# EAGLE board fDrive.RP2040 (EAGLE 9.6.2)
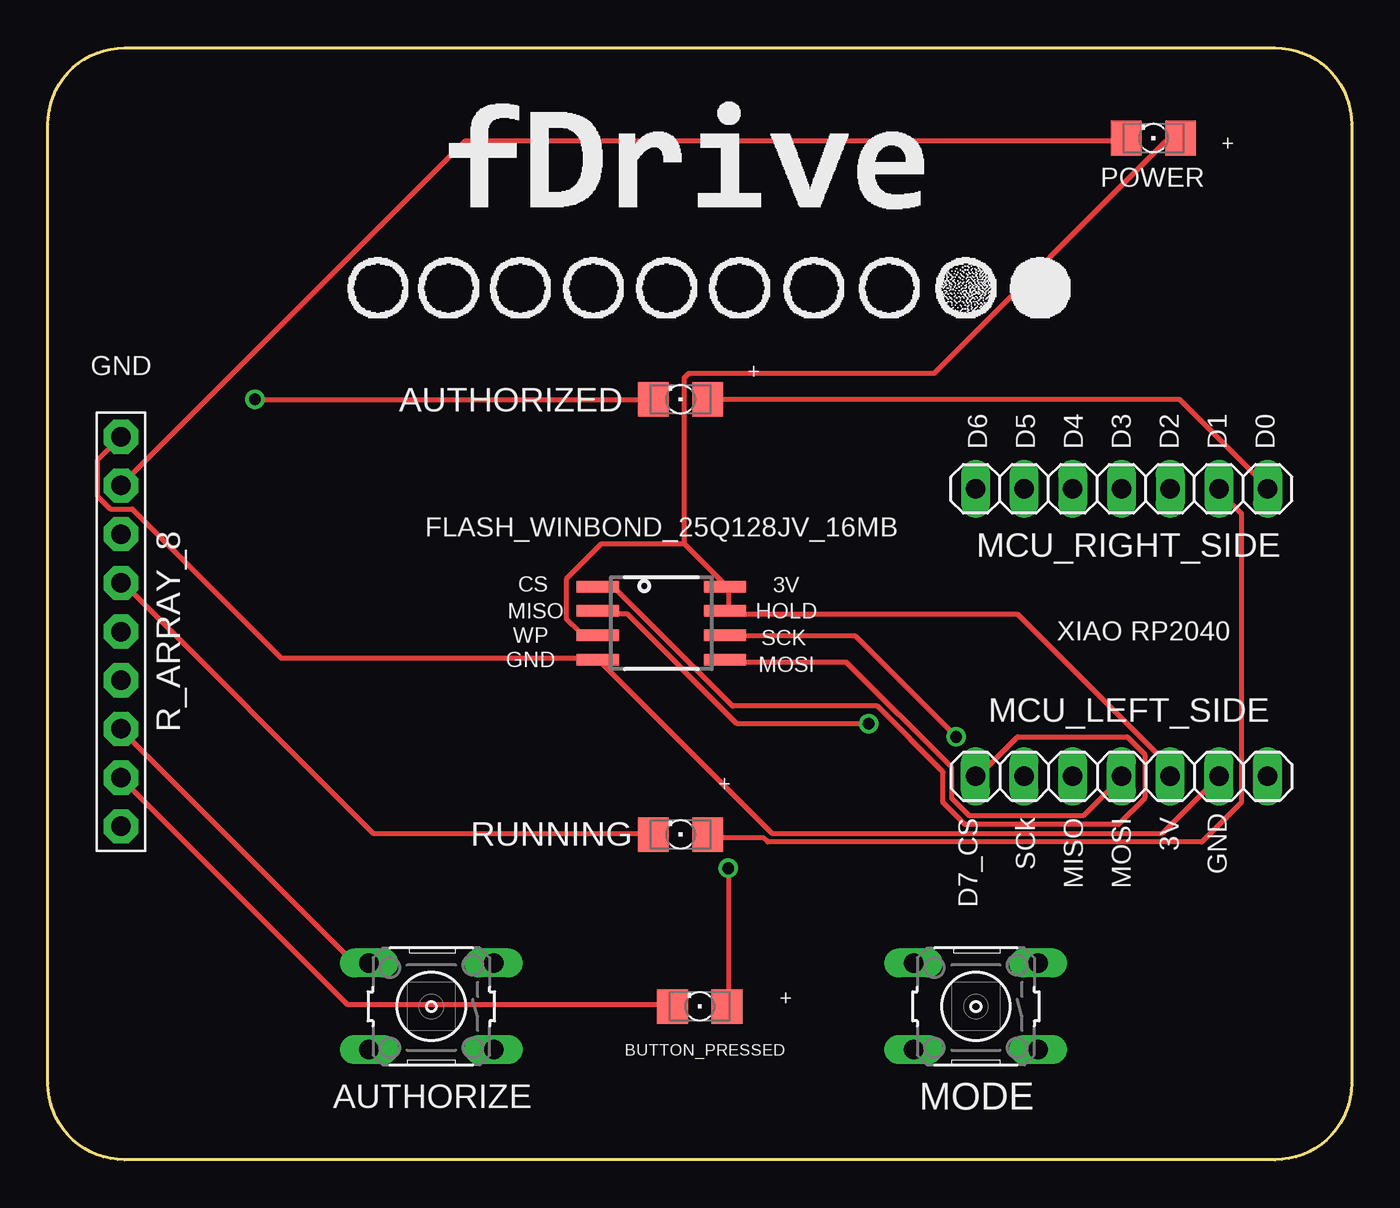
[diagram p0: board, top side]
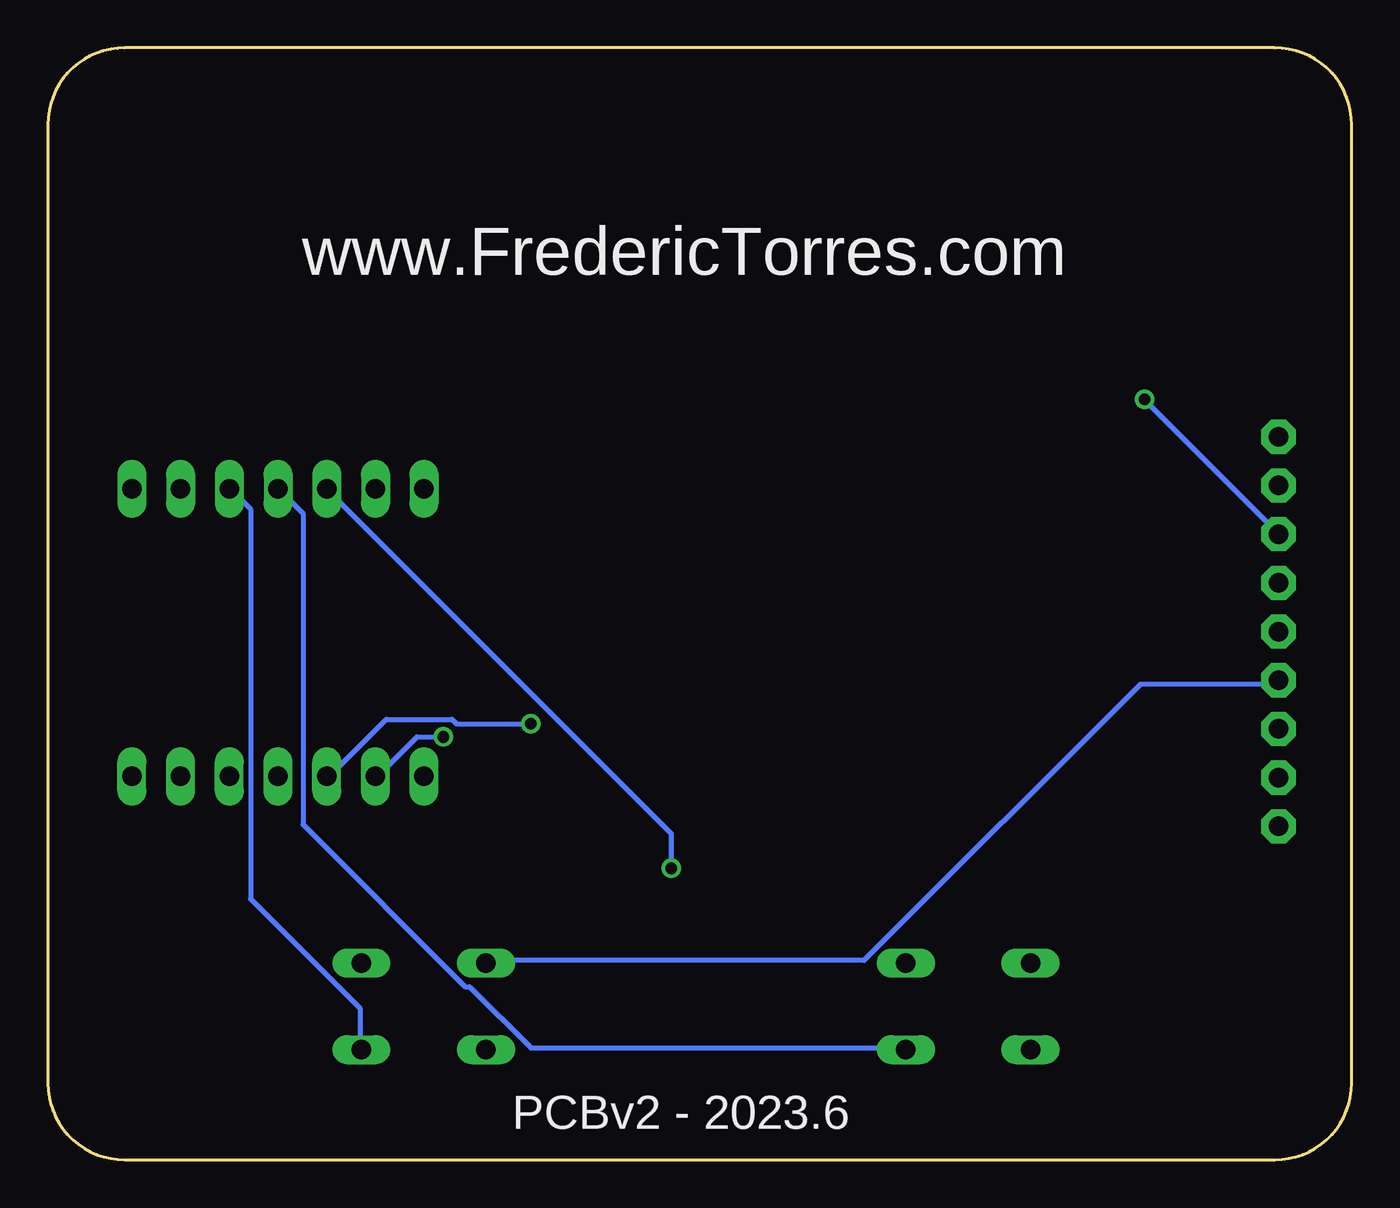
[diagram p1: board, bottom side, seen from below]

Size 68 x 58 mm. Coordinates in mm from the lower left corner, seen from the top.
Outline: 0,4 0,54 arc-90 4,58 64,58 arc-90 68,54 68,4 arc-90 64,0 4,0 arc-90 0,4
Copper layers (1*16): Top 0.035mm / dielectric 1.5mm / Bottom 0.035mm
Design rules "default": minimum track width 10mil, minimum drill 24mil, track to track 8mil, track to pad 8mil, pad to pad 8mil, via to via 8mil, smd to smd 8mil, copper to edge 40mil, drill to drill 8mil, minimum pad ring 10mil, minimum via ring 8mil, stop-mask expansion 4mil, vias tented up to drill 0mil, thermal gap 10mil

## Footprints (pad centres in the part's own frame; a part is rotated, then mirrored left to right if it is on the bottom)
B3F-10XX = drill 1.016 long: 1 -3.251,2.261; 2 3.251,2.261; 3 -3.251,-2.261; 4 3.251,-2.261
1206 = smd 1.6 x 1.803: A -1.422,0; C 1.422,0
SOIC8_208MIL = smd 0.6 x 2.2: 1 -1.905,-3.315; 2 -0.635,-3.315; 3 0.635,-3.315; 4 1.905,-3.315; 5 1.905,3.315; 6 0.635,3.315; 7 -0.635,3.315; 8 -1.905,3.315
1X07 = drill 1.016 long: 1 -7.62,0; 2 -5.08,0; 3 -2.54,0; 4 0,0; 5 2.54,0; 6 5.08,0; 7 7.62,0
1X09-BIG = drill 1.016 pad 1.778 octagon: 1 -10.16,0; 2 -7.62,0; 3 -5.08,0; 4 -2.54,0; 5 0,0; 6 2.54,0; 7 5.08,0; 8 7.62,0; 9 10.16,0

## Placement (x,y rotation side)
AUTHORIZE  [B3F-10XX]  20,8 180 top
AUTHORIZED  [1206]  33,39.67 180 top
BUTTON_PRESSED  [1206]  34,8 180 top
FLASH_WINBOND_25Q128JV_16MB  [SOIC8_208MIL]  32,28 270 top
MCU_LEFT_SIDE  [1X07]  56,20 0 top
MCU_RIGHT_SIDE  [1X07]  56,35 180 top
MODE  [B3F-10XX]  48.4,8 180 top
POWER  [1206]  57.67,53.29 180 top
R_ARRAY_8  [1X09-BIG]  3.81,27.56 270 top
RUNNING  [1206]  33,16.97 180 top

## Library data of the parts
AUTHORIZE MODE = switch-omron; MPN: B3F-1000; OC_FARNELL: 176432; OC_NEWARK: 36M3542
AUTHORIZED BUTTON_PRESSED POWER R_ARRAY_8 RUNNING = adafruit
FLASH_WINBOND_25Q128JV_16MB = microbuilder
MCU_LEFT_SIDE MCU_RIGHT_SIDE = pinhead

## Nets
GND: FLASH_WINBOND_25Q128JV_16MB.4 MCU_LEFT_SIDE.6 R_ARRAY_8.1
MCU_D0: AUTHORIZED.A MCU_RIGHT_SIDE.1
MCU_D1: MCU_RIGHT_SIDE.2 RUNNING.A
MCU_D2: MCU_RIGHT_SIDE.3 MODE.1
MCU_D3: AUTHORIZE.1 MCU_RIGHT_SIDE.4
MCU_D4: BUTTON_PRESSED.A MCU_RIGHT_SIDE.5
MCU_D5: MCU_RIGHT_SIDE.6
MCU_D6: MCU_RIGHT_SIDE.7
MCU_D7_CS: FLASH_WINBOND_25Q128JV_16MB.1 MCU_LEFT_SIDE.1
MCU_D8_SCK: FLASH_WINBOND_25Q128JV_16MB.6 MCU_LEFT_SIDE.2
MCU_D9_MISO: FLASH_WINBOND_25Q128JV_16MB.2 MCU_LEFT_SIDE.3
MCU_D10_MOSI: FLASH_WINBOND_25Q128JV_16MB.5 MCU_LEFT_SIDE.4
RA_1: POWER.C R_ARRAY_8.2
RA_2: AUTHORIZED.C R_ARRAY_8.3
RA_3: R_ARRAY_8.4 RUNNING.C
RA_4: R_ARRAY_8.5
RA_5: MODE.4 R_ARRAY_8.6
RA_6: AUTHORIZE.4 R_ARRAY_8.7
RA_7: BUTTON_PRESSED.C R_ARRAY_8.8
VCC_33: FLASH_WINBOND_25Q128JV_16MB.3 FLASH_WINBOND_25Q128JV_16MB.7 FLASH_WINBOND_25Q128JV_16MB.8 MCU_LEFT_SIDE.5 POWER.A

## Tracks (layer width: path | path; a pad name or v marks a point on that pad's centre or on a via)
GND
  Top 0.254: R_ARRAY_8.1 3.71,37.61 2.57,36.46 2.57,34.63 3.26,33.95 4.4,33.95 12.17,26.18 28.63,26.18 FLASH_WINBOND_25Q128JV_16MB.4 28.86,25.95 37.78,17.03 58.12,17.03 60.87,19.77 MCU_LEFT_SIDE.6
MCU_D0
  Top 0.254: AUTHORIZED.A 34.58,39.66 59.04,39.66 63.61,35.09 MCU_RIGHT_SIDE.1
MCU_D1
  Top 0.254: RUNNING.A 34.58,16.8 37.32,16.8 37.55,16.57 60.18,16.57 62.24,18.63 62.24,33.72 61.09,34.86 MCU_RIGHT_SIDE.2
MCU_D2
  Bottom 0.254: MODE.1 51.72,5.83 51.72,7.89 57.44,13.6 57.44,33.95 58.35,34.86 MCU_RIGHT_SIDE.3
MCU_D3
  Bottom 0.254: AUTHORIZE.1 23.38,5.83 42.81,5.83 46.01,9.03 46.23,9.03 54.69,17.49 54.69,33.72 55.84,34.86 MCU_RIGHT_SIDE.4
MCU_D4  (via drill 0.61)
  Top 0.254: v35.49,15.2 35.49,8.12 BUTTON_PRESSED.A
  Bottom 0.254: v35.49,15.2 35.49,17.03 53.32,34.86 MCU_RIGHT_SIDE.5
MCU_D7_CS
  Top 0.254: FLASH_WINBOND_25Q128JV_16MB.1 28.86,29.83 29.55,29.83 35.72,23.66 43.26,23.66 46.69,20.23 46.69,18.63 47.84,17.49 55.84,17.49 57.21,18.86 57.21,21.15 56.29,22.06 50.58,22.06 48.52,20 MCU_LEFT_SIDE.1
MCU_D8_SCK  (via drill 0.61)
  Top 0.254: v47.38,22.06 42.12,27.32 35.49,27.32 FLASH_WINBOND_25Q128JV_16MB.6
  Bottom 0.254: v47.38,22.06 48.75,22.06 50.81,20 MCU_LEFT_SIDE.2
MCU_D9_MISO  (via drill 0.61)
  Top 0.254: v42.81,22.75 35.95,22.75 30.23,28.46 28.86,28.46 FLASH_WINBOND_25Q128JV_16MB.2
  Bottom 0.254: v42.81,22.75 46.69,22.75 46.92,22.98 50.35,22.98 53.32,20 MCU_LEFT_SIDE.3
MCU_D10_MOSI
  Top 0.254: FLASH_WINBOND_25Q128JV_16MB.5 35.49,25.95 41.66,25.95 47.15,20.46 47.15,18.86 48.06,17.95 54.01,17.95 55.84,19.77 MCU_LEFT_SIDE.4
RA_1
  Top 0.254: POWER.C 56.06,53.15 21.77,53.15 3.94,35.32 R_ARRAY_8.2
RA_2  (via drill 0.61)
  Top 0.254: v10.8,39.66 31.38,39.66 AUTHORIZED.C
  Bottom 0.254: v10.8,39.66 3.94,32.81 R_ARRAY_8.3
RA_3
  Top 0.254: RUNNING.C 31.38,17.03 16.97,17.03 3.94,30.06 R_ARRAY_8.4
RA_5
  Bottom 0.254: MODE.4 45.09,10.4 25.43,10.4 11.03,24.8 3.94,24.8 R_ARRAY_8.6
RA_6
  Top 0.254: AUTHORIZE.4 16.75,10.4 15.83,10.4 3.94,22.29 R_ARRAY_8.7
RA_7
  Top 0.254: BUTTON_PRESSED.C 32.52,8.12 15.6,8.12 3.94,19.77 R_ARRAY_8.8
VCC_33
  Top 0.254: 33.2,32.12 33.2,40.81 33.43,41.03 46.23,41.03 58.35,53.15 59.04,53.15 POWER.A | 33.2,32.12 35.26,30.06 FLASH_WINBOND_25Q128JV_16MB.8 35.49,29.83 35.49,28.69 FLASH_WINBOND_25Q128JV_16MB.7 35.49,28.46 50.58,28.46 58.35,20.69 58.35,20 MCU_LEFT_SIDE.5 | 33.2,32.12 28.86,32.12 27.03,30.29 27.03,28.23 27.72,27.55 28.63,27.55 FLASH_WINBOND_25Q128JV_16MB.3

## Text on the board
tNames: + | GND | + | D6 | D5 | D4 | D3 | D2 | D1 | D0 | CS | 3V | MISO | HOLD | XIAO RP2040 | WP | SCK | GND | MOSI | + | 3V | D7_CS | SCk | MISO | MOSI | GND | + | C:/DVT/Fred.PCB/2023/fDrive.RP2040/MadeInTheUSB.Logo.Gray.50.bmp | C:/DVT/Fred.PCB/2023/fDrive.RP2040/MadeInTheUSB.Logo.Gray.50.bmp | C:/DVT/Fred.PCB/2023/fDrive.RP2040/MadeInTheUSB.Logo.Gray.50.bmp | C:/DVT/Fred.PCB/2023/fDrive.RP2040/MadeInTheUSB.Logo.Gray.bmp | C:/DVT/Fred.PCB/2023/fDrive.RP2040/MadeInTheUSB.Logo.Gray.bmp | C:/DVT/Fred.PCB/2023/fDrive.RP2040/MadeInTheUSB.Logo.Gray.bmp | C:/DVT/Fred.PCB/2023/fDrive.RP2040/MadeInTheUSB.Logo.Gray.bmp | C:/DVT/Fred.PCB/2023/fDrive.RP2040/MadeInTheUSB.Logo.Gray.bmp | C:/DVT/Fred.PCB/2023/fDrive.RP2040/Title.fDrive.Logo.Gray.bmp | C:/DVT/Fred.PCB/2023/fDrive.RP2040/Title.fDrive.Logo.Gray.bmp | C:/DVT/Fred.PCB/2023/fDrive.RP2040/Title.fDrive.Logo.Gray.bmp | C:/DVT/Fred.PCB/2023/fDrive.RP2040/Title.fDrive.Logo.Gray.bmp | C:/DVT/Fred.PCB/2023/fDrive.RP2040/Title.fDrive.Logo.Gray.bmp | C:/DVT/Fred.PCB/EXTENSIONS/BNSK-Rambo-Converters-Device/Rambo.BW.bmp | C:/DVT/Fred.PCB/EXTENSIONS/BNSK-Rambo-Converters-Device/Title.Converters Automation Device.bmp | C:/DVT/Fred.PCB/EXTENSIONS/BNSK-Rambo-Converters-Device/Title.RAMBO.bmp | C:/DVT/Fred.PCB/EXTENSIONS/BNSK-Rambo-Converters-Device/Title.bmp
bNames: www.FredericTorres.com | PCBv2 - 2023.6